# Altium PCB SWD_Cat_Programmer.PcbDoc
Units mm, origin at the board's own origin, x right, y up, seen from the top; angles counter-clockwise.
Board outline 40.55 x 20.09 mm, 2 copper layers (F.Cu, B.Cu); 28 components, 26 nets, 87 pads, 16 vias.
Unrouted connection lines stored in the file: 3.
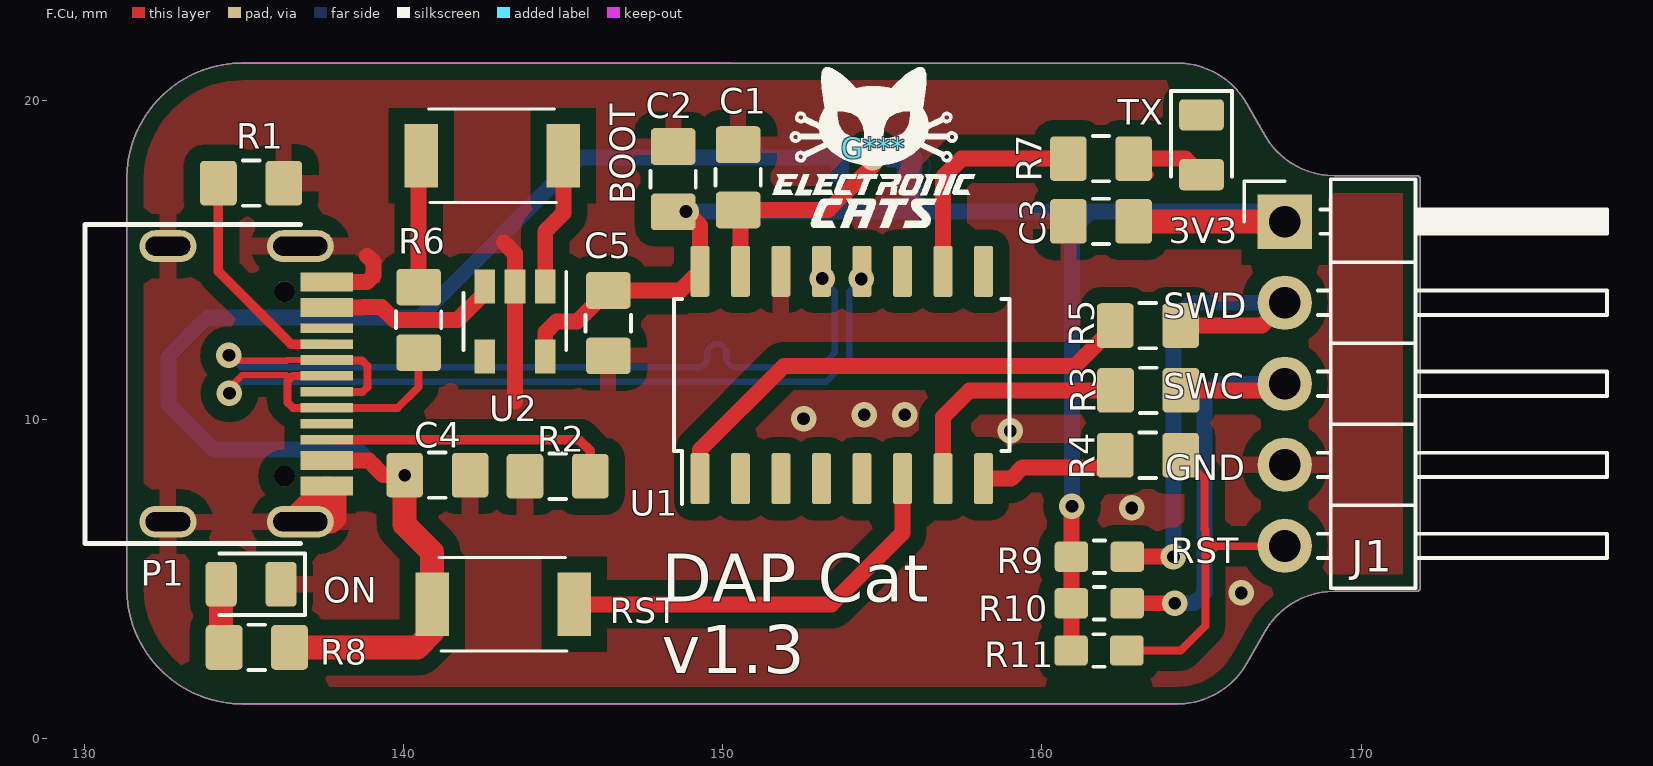
[diagram p0: F.Cu view]
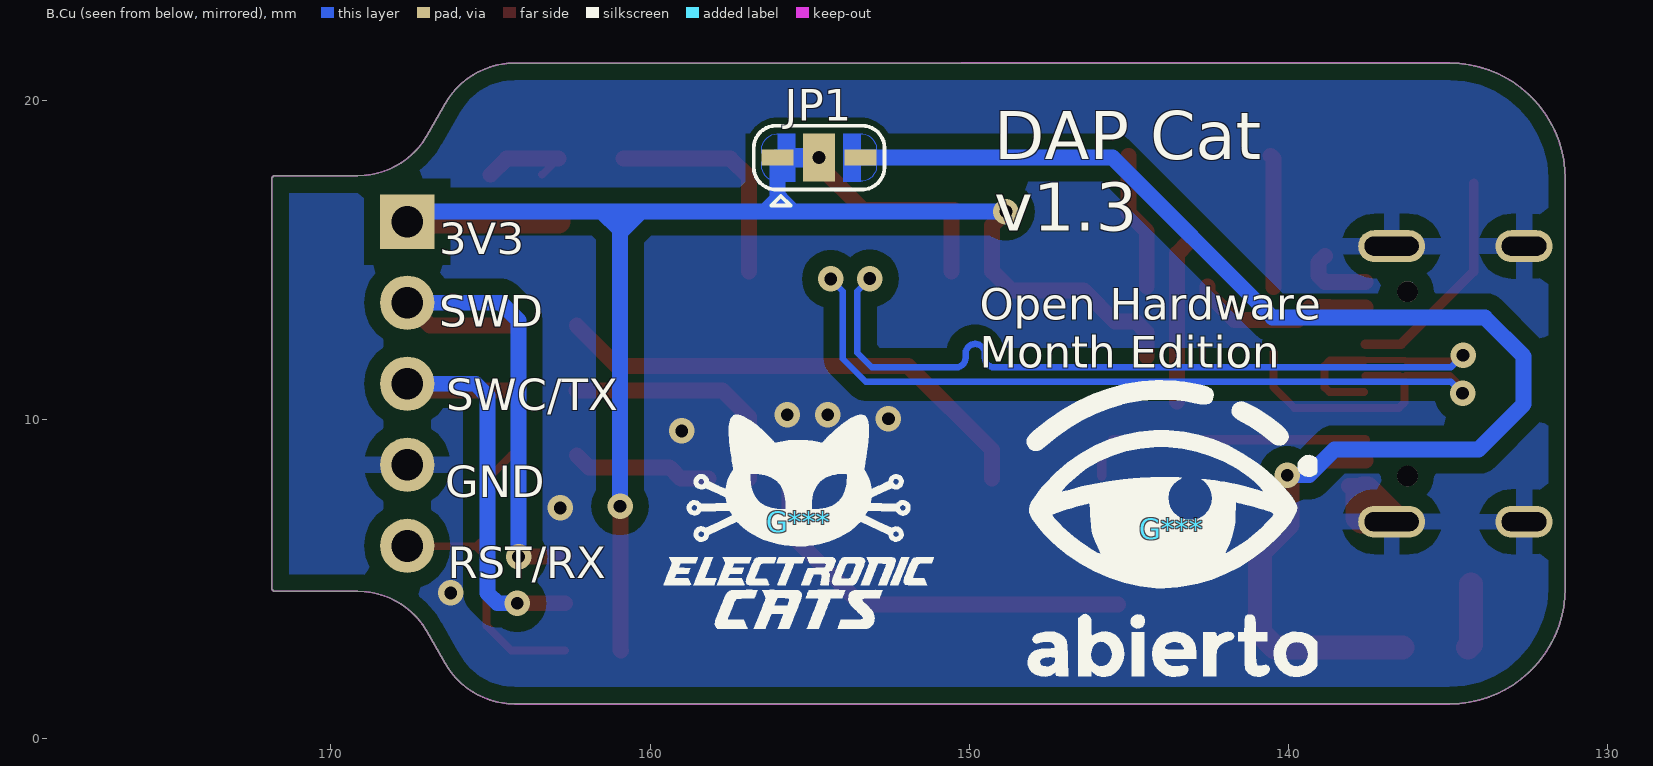
[diagram p1: B.Cu view, seen from below]

## Layer stack, top to bottom
F.Mask: solder mask 0.0102, Solder Resist, Dk 3.5
F.Cu: signal copper 0.0356
Dielectric 1: dielectric 0.32, FR-4, Dk 4.8
B.Cu: signal copper 0.0356
B.Mask: solder mask 0.0102, Solder Resist, Dk 3.5

## Board outline
150.236,21.184 136.235,21.184 134.94,21.184 ccw(c134.94,17.551) 131.308,17.551 131.308,4.725 ccw(c134.94,4.725) 134.94,1.093 136.235,1.092 150.236,1.093 164.236,1.093 ccw(c164.236,3.607) 166.421,2.362 166.98,3.353 cw(c169.164,2.109) 171.755,4.623 ccw(c171.755,4.724) 171.856,4.724 171.856,17.551 ccw(c171.755,17.551) 171.755,17.653 169.164,17.653 cw(c169.164,20.167) 166.98,18.923 166.421,19.914 ccw(c164.236,18.669) 150.236,21.184

## Design rules (kind name [scope] priority, off if disabled: settings)
Clearance "Clearence 0.508_Polygon" [InNamedPolygon('B.Cu-GND') OR InNamedPolygon('F.Cu-GND')] p1: gap=0.508 ignorepadtopadclearanceinfootprint=FALSE
Clearance "Clearence 0.2_NetClass" [InNetClass('Default')] p2: gap=0.2 ignorepadtopadclearanceinfootprint=FALSE
HoleSize "Hole Size (Default)" [All] p1: absolutevalues=TRUE maxlimit=10 minlimit=0.3 maxpercent=80.000 minpercent=20.000
MinimumSolderMaskSliver [All] p1: minsoldermaskwidth=0
PolygonConnect Polygon_F.Cu-GND_ConnectDirect [IsNamedPolygon('F.Cu-GND') vs IsVia] p1: connectstyle=Direct reliefconductorwidth=0.254 reliefentries=4 polygonreliefangle="90 Angle" airgapwidth=0.254
PolygonConnect Polygon_F.Cu-GND_ConnectRelief45 [IsNamedPolygon('F.Cu-GND') vs (IsThruPin or IsSMTPin) and (PadShape_AllLayers = 'Round')] p2: connectstyle=Relief reliefconductorwidth=0.508 reliefentries=4 polygonreliefangle="45 Angle" airgapwidth=0.508
PolygonConnect Polygon_F.Cu-GND_ConnectRelief90 [IsNamedPolygon('F.Cu-GND') vs (IsThruPin or IsSMTPin) and (PadShape_AllLayers <> 'Round')] p3: connectstyle=Relief reliefconductorwidth=0.508 reliefentries=4 polygonreliefangle="90 Angle" airgapwidth=0.508
PolygonConnect Polygon_B.Cu-GND_ConnectDirect [IsNamedPolygon('B.Cu-GND') vs IsVia] p4: connectstyle=Direct reliefconductorwidth=0.254 reliefentries=4 polygonreliefangle="90 Angle" airgapwidth=0.254
PolygonConnect Polygon_B.Cu-GND_ConnectRelief45 [IsNamedPolygon('B.Cu-GND') vs (IsThruPin or IsSMTPin) and (PadShape_AllLayers = 'Round')] p5: connectstyle=Relief reliefconductorwidth=0.508 reliefentries=4 polygonreliefangle="45 Angle" airgapwidth=0.508
PolygonConnect Polygon_B.Cu-GND_ConnectRelief90 [IsNamedPolygon('B.Cu-GND') vs (IsThruPin or IsSMTPin) and (PadShape_AllLayers <> 'Round')] p6: connectstyle=Relief reliefconductorwidth=0.508 reliefentries=4 polygonreliefangle="90 Angle" airgapwidth=0.508
RoutingVias [All] p1: holewidth=0.711 width=1.27 viastyle="Through Hole" minholewidth=0.711 minwidth=1.27 maxholewidth=0.711 maxwidth=1.27
SilkToSilkClearance [All] p1: silktosilkclearance=0
SilkToSolderMaskClearance [IsPad] p1: minsilkscreentomaskgap=0 clearancetoexposedcopper=TRUE
SolderMaskExpansion [All] p1: expansion=0.102 istentingtop=FALSE
Width [All] p1: maxlimit=10 minlimit=0.2 preferedwidth=0.25 minimp=50.000000 maximp=50.000000 favimp=50.000000
26 further rules are at their usual default settings.

## Classes and differential pairs
net class Default: +3V3 +5V D+ D- GND LED Net-(C1-Pad1) Net-(D1-Pad2) Net-(D2-Pad2) Net-(P1-PadA5) Net-(P1-PadB5) Net-(R3-Pad2) Net-(R4-Pad2) Net-(R5-Pad2) Net-(R6-Pad2) Net-(U1-Pad2) Net-(U1-Pad3) Net-(U1-Pad4) Net-(U1-Pad5) Net-(U1-Pad9) Net-(U1-Pad11) Net-(U2-Pad4) RESET RST SWCLK SWDIO

## Components (designator, comment, footprint, x,y, rotation, side; value= is the part's Value field where it differs from the comment)
BOOT "BOOT" TS1088R02026 142.773,18.278 r180 top
C1 "0.1uF" C_0805_2012Metric_Pad1.15x1.40mm_HandSolder 150.475,17.602 r90 top
C2 "0.1uF" C_0805_2012Metric_Pad1.15x1.40mm_HandSolder 148.438,17.543 r90 top
C3 "0.1uF" C_0805_2012Metric_Pad1.15x1.40mm_HandSolder 161.85,16.22 r180 top
C4 "1uF" C_0805_2012Metric_Pad1.15x1.40mm_HandSolder 141.049,8.265 r0 top
C5 "1uF" C_0805_2012Metric_Pad1.15x1.40mm_HandSolder 146.406,13.03 r270 top
G*** "LOGO" electronic_cats_logo_8x6 155.34,6.8 r0 bottom
G*** "LOGO" electronic_cats_logo_4x3 154.727,18.534 r0 top
G*** "LOGO" abierto 143.65,6.59 r0 bottom
J1 "DEBUG_OUTPUT" PinHeader_1x05_P2.54mm_Horizontal 167.61,16.21 r0 top
JP1 "Jumper" SolderJumper-3_P1.3mm_Bridged12_RoundedPad1.0x1.5mm 154.7,18.22 r0 bottom
ON "LED" LED_0805_2012Metric 135.209,4.846 r180 top
P1 "USB_C_Plug_USB2.0" C393939 136.754,11.125 r270 top
R1 "5.1K" R_0805_2012Metric_Pad1.15x1.40mm_HandSolder 135.209,17.42 r180 top
R2 "5.1K" R_0805_2012Metric_Pad1.15x1.40mm_HandSolder 144.818,8.232 r0 top
R3 "150" R_0805_2012Metric_Pad1.15x1.40mm_HandSolder 163.331,10.922 r180 top
R4 "150" R_0805_2012Metric_Pad1.15x1.40mm_HandSolder 163.322,8.89 r180 top
R5 "150" R_0805_2012Metric_Pad1.15x1.40mm_HandSolder 163.322,12.954 r180 top
R6 "20K" R_0805_2012Metric_Pad1.15x1.40mm_HandSolder 140.462,13.132 r90 top
R7 "1K" R_0805_2012Metric_Pad1.15x1.40mm_HandSolder 161.85,18.186 r180 top
R8 "1K" R_0805_2012Metric_Pad1.15x1.40mm_HandSolder 135.387,2.865 r0 top
R9 "70" R_0603_1608Metric_Pad1.05x0.95mm_HandSolder 161.8,5.71 r180 top
R10 "70" R_0603_1608Metric_Pad1.05x0.95mm_HandSolder 161.795,4.25 r180 top
R11 "70" R_0603_1608Metric_Pad1.05x0.95mm_HandSolder 161.785,2.77 r180 top
RST "RST" TS1088R02026 143.109,4.216 r0 top
TX "LED" LED_0805_2012Metric 165,18.62 r270 top
U1 "CH552G" SOP-16_4.55x10.3mm_P1.27mm 153.721,11.405 r90 top
U2 "AP2112K-3.3" SOT-23-5 143.48,13.08 r270 top

## Footprints (in the part's own frame and the unit in brackets; to place one, negate y for a bottom-side part, rotate by r counter-clockwise, add the part's x,y. Pads: shape width x height; smd on the part's side, far side on the other; paste and mask are expansions set on the pad)
abierto [mm]
  silkscreen extent -4.57,-4.65 4.55,4.65
C393939 [mm]
  rect 0.6x1.65 smd mask+0.05: A1(-3.2,0.825) A1(3.2,0.825) A4(-2.4,0.825) A4(2.4,0.825)
  rect 0.3x1.65 smd mask+0.05: A5(-1.25,0.825) A6(-0.25,0.825) A6(0.75,0.825) A7(-0.75,0.825) A7(0.25,0.825) A8(-1.75,0.825) B5(1.75,0.825) B8(1.25,0.825)
  rrect100% 1x2.1 hole 1.7 slot 0.6 at 0 deg paste-2.1 mask+0.05: S1(-4.32,0) S1(4.32,0)
  rrect100% 1x1.8 hole 1.4 slot 0.6 at 0 deg paste-1.8 mask+0.05: S1(-4.32,-4.15) S1(4.32,-4.15)
  round 0.65 hole 0.65 paste-0.65 mask+0.05: Un1(2.89,-0.5) Un2(-2.89,-0.5)
  silkscreen extent -5,-6.75 5,0
C_0805_2012Metric_Pad1.15x1.40mm_HandSolder [mm]
  rrect22% 1.15x1.4 smd mask+0.05: 1(-1.025,0) 2(1.025,0)
  silkscreen extent -0.26,-0.71 0.26,0.71
electronic_cats_logo_4x3 [mm]
  silkscreen extent -3.17,-2.51 3.17,2.51
electronic_cats_logo_8x6 [mm]
  silkscreen extent -4.23,-3.35 4.23,3.35
LED_0805_2012Metric [mm]
  rrect25% 0.975x1.4 smd mask+0.05: 1(-0.937,0) 2(0.937,0)
  silkscreen extent -1.69,-0.96 1,0.96
PinHeader_1x05_P2.54mm_Horizontal [mm]
  rect 1.7x1.7 hole 1 paste-1.7 mask+0.05: 1(0,0)
  rrect100% 1.7x1.7 hole 1 paste-1.7 mask+0.05: 2(0,-2.54) 3(0,-5.08) 4(0,-7.62) 5(0,-10.16)
  silkscreen extent -1.27,-11.49 10.1,1.33
R_0603_1608Metric_Pad1.05x0.95mm_HandSolder [mm]
  rrect25% 1.05x0.95 smd mask+0.05: 1(-0.875,0) 2(0.875,0)
  silkscreen extent -0.17,-0.51 0.17,0.51
R_0805_2012Metric_Pad1.15x1.40mm_HandSolder [mm]
  rrect22% 1.15x1.4 smd mask+0.05: 1(-1.025,0) 2(1.025,0)
  silkscreen extent -0.26,-0.71 0.26,0.71
SolderJumper-3_P1.3mm_Bridged12_RoundedPad1.0x1.5mm [mm]
  rect 1x0.5 smd paste-1 mask+0.05: 1(1.3,0) 3(-1.3,0)
  rect 1x1.5 smd paste-1.5 mask+0.05: 2(0,0)
  F.Cu circle w0: c-1.3,-0.25 r0.5
  F.Cu circle w0: c-1.3,0.25 r0.5
  F.Cu circle w0: c1.3,-0.25 r0.5
  F.Cu circle w0: c1.3,0.25 r0.5
  F.Cu region: -1.3,-0.75 -0.75,-0.75 -0.75,0.75 -1.3,0.75
  F.Cu region: 0.75,-0.75 1.3,-0.75 1.3,0.75 0.75,0.75
  F.Cu region: 0.4,-0.3 0.9,-0.3 0.9,0.3 0.4,0.3
  silkscreen extent -2.05,-1 2.05,1.5
SOP-16_4.55x10.3mm_P1.27mm [mm]
  rrect25% 1.6x0.6 smd mask+0.05: 1(-3.25,4.445) 2(-3.25,3.175) 3(-3.25,1.905) 4(-3.25,0.635) 5(-3.25,-0.635) 6(-3.25,-1.905) 7(-3.25,-3.175) 8(-3.25,-4.445) 9(3.25,-4.445) 10(3.25,-3.175) 11(3.25,-1.905) 12(3.25,-0.635) 13(3.25,0.635) 14(3.25,1.905) 15(3.25,3.175) 16(3.25,4.445)
  silkscreen extent -4.05,-5.26 2.38,5.26
SOT-23-5 [mm]
  rect 1.06x0.65 smd mask+0.05: 1(-1.1,0.95) 2(-1.1,0) 3(-1.1,-0.95) 4(1.1,-0.95) 5(1.1,0.95)
  silkscreen extent -1.55,-1.61 0.9,1.61
TS1088R02026 [mm]
  rect 1.05x2 smd mask+0.05: 1(-2.225,0) 2(2.225,0)
  silkscreen extent -2,-1.47 2,1.47

## Part data
BOOT RST: library part TS1088R02026, "TS-1088R-02026-1"
C1 C2 C3 C4 C5: library part C_0805_2012Metric_Pad1.15x1.40mm_HandSolder, "Capacitor SMD 0805 (2012 Metric), square (rectangular) end terminal, IPC_7351 nominal with elongated pad for handsoldering. (Body size source: https://docs.google.com/spreadsheets/d/1BsfQQcO9C6DZCsRaXUlFlo91Tg2WpOkGARC1WS5S8t0/edit?usp=sharing), generated with kicad-footprint-generator"
G***: library part electronic_cats_logo_8x6
G***: library part electronic_cats_logo_4x3
G***: library part abierto
J1: library part PinHeader_1x05_P2.54mm_Horizontal, "Through hole angled pin header, 1x05, 2.54mm pitch, 6mm pin length, single row"
JP1: library part SolderJumper-3_P1.3mm_Bridged12_RoundedPad1.0x1.5mm, "SMD Solder 3-pad Jumper, 1x1.5mm rounded Pads, 0.3mm gap, pads 1-2 bridged with 1 copper strip"
ON TX: library part LED_0805_2012Metric, "LED SMD 0805 (2012 Metric), square (rectangular) end terminal, IPC_7351 nominal, (Body size source: https://docs.google.com/spreadsheets/d/1BsfQQcO9C6DZCsRaXUlFlo91Tg2WpOkGARC1WS5S8t0/edit?usp=sharing), generated with kicad-footprint-generator"
P1: library part C393939
R1 R2 R3 R4 R5 R6 R7 R8: library part R_0805_2012Metric_Pad1.15x1.40mm_HandSolder, "Resistor SMD 0805 (2012 Metric), square (rectangular) end terminal, IPC_7351 nominal with elongated pad for handsoldering. (Body size source: https://docs.google.com/spreadsheets/d/1BsfQQcO9C6DZCsRaXUlFlo91Tg2WpOkGARC1WS5S8t0/edit?usp=sharing), generated with kicad-footprint-generator"
R9 R10 R11: library part R_0603_1608Metric_Pad1.05x0.95mm_HandSolder, "Resistor SMD 0603 (1608 Metric), square (rectangular) end terminal, IPC_7351 nominal with elongated pad for handsoldering. (Body size source: http://www.tortai-tech.com/upload/download/2011102023233369053.pdf), generated with kicad-footprint-generator"
U1: library part SOP-16_4.55x10.3mm_P1.27mm, "SOP, 16 Pin (https://toshiba.semicon-storage.com/info/docget.jsp?did=12855&prodName=TLP290-4), generated with kicad-footprint-generator ipc_gullwing_generator.py"
U2: library part SOT-23-5, "5-pin SOT23 package"

## Via types
v1: diameter 0.8, hole 0.4, F.Cu to B.Cu, tented both sides, 16 vias

## Nets (pads, with @x,y where several pads share a name; then routed paths per layer and width w, separated by ;. In a path a pad name is that pad's centre, name@x,y a point inside that pad or via, vN(x,y) a via of type N, cw(c..) or ccw(c..) an arc to the next point about the centre after c; other vN are vias at no path point)
+3V3: C2.1 C3.1 C5.1 J1.1 JP1.1 R9.2 R10.2 R11.2 U1.16 U2.5 | length 53.1
  F.Cu w0.5: U2.5 144.43,12.731 144.78,13.081 145.431,13.081 C5.1 ; C5.1@146.381,14.031 C5.1 ; v1(148.844,16.526) 149.276,16.095 U1.16 148.676,14.055 146.425,14.055 C5.1 ; R11.2 160.92,2.78 R10.2 160.92,5.705 R9.2 160.925,7.275 v1(160.94,7.29)
  F.Cu w0.75: C3.1 J1.1@167.6,16.22 ; 164.61,16.22 J1.1@167.6,16.22 ; J1.1 J1.1@167.6,16.22
  B.Cu w0.5: v1(148.844,16.526) 155.506,16.526 ; JP1.1 156,16.933 ; v1(160.94,7.29) 160.94,15.94 ; J1.1 167.294,16.526 162.706,16.526 161.506,16.526 ; 155.506,16.526 156.406,16.526 ; 155.506,16.526 155.913,16.933 156,16.933 ; 156,16.933 156.406,16.526 ; 156.406,16.526 160.106,16.526 160.28,16.53 ; 160.28,16.53 160.87,15.94 160.94,15.94 ; 160.28,16.53 160.694,16.526 160.99,16.53 ; 160.94,15.94 160.94,15.96 161.506,16.526 ; 160.94,15.94 160.94,16.48 160.99,16.53 ; 160.99,16.53 161.506,16.526
+5V: BOOT.1 C4.1 JP1.3 P1.A4 R8.2 RST.1 U2.1 U2.3 | length 56.4
  F.Cu w0.5: P1.A4@137.579,13.525 138.714,13.525 138.722,13.533 139.299,13.533 139.7,13.132 141.384,13.132 141.687,13.132 142.53,13.975 U2.3 ; P1.A4@138.155,8.775 138.105,8.725 137.579,8.725 138.904,8.725 139.09,8.538 139.09,8.524 139.349,8.265 v1(140.024,8.265) ; U2.1 144.43,15.906 144.998,16.474 BOOT.1
  F.Cu w0.75: R8.2 140.416,2.865 140.884,3.333 RST.1 140.884,5.862 140.024,6.722 v1(140.024,8.265)
  B.Cu w0.5: v1(140.024,8.265) 139.349,8.265 138.546,9.068 134.036,9.068 132.613,10.49 132.613,11.989 133.833,13.208 140.488,13.208 145.5,18.22 145.7,18.22 JP1.3
D+: P1.A6 R6.1 U1.12 | length 33.8
  F.Cu w0.2: v1(134.531,10.833) 134.531,11.006 134.925,11.4 136.316,11.4 136.341,11.375 P1.A6@137.579,11.375 ; v1@134.549,10.734 v1@134.783,10.968 ; U1.12@154.335,14.634 U1.12
  F.Cu w0.25: P1.A6@137.579,11.375 136.504,11.375 136.348,11.22 136.348,10.968 136.348,10.545 136.519,10.375 137.579,10.375 139.806,10.375 140.462,11.031 R6.1
  B.Cu w0.2: v1(134.531,10.833) 134.893,11.195 153.237,11.195 153.953,11.911 153.953,14.032 v1(154.335,14.414)
D-: P1.A7 U1.13 | length 29.4
  F.Cu w0.2: v1@134.503,11.989 v1@134.617,11.875 ; v1(134.513,12.024) 134.687,11.85 136.316,11.85 136.341,11.875 P1.A7@137.579,11.875 ; U1.13 U1.13@153.126,14.614
  F.Cu w0.25: P1.A7@137.621,10.865 138.696,10.865 138.852,11.02 138.852,11.695 138.681,11.865 P1.A7@137.621,11.865
  B.Cu w0.2: v1(134.513,12.024) 134.893,11.645 149.207,11.645 149.274,11.652 149.337,11.675 149.394,11.71 149.442,11.758 149.477,11.815 149.5,11.878 149.507,11.945 149.507,12.079 149.515,12.146 149.537,12.209 149.573,12.266 149.62,12.313 149.677,12.349 149.74,12.371 149.807,12.379 149.874,12.371 149.937,12.349 149.994,12.313 150.042,12.266 150.077,12.209 150.1,12.146 150.107,12.079 150.107,11.945 150.115,11.878 150.137,11.815 150.173,11.758 150.22,11.71 150.277,11.675 150.34,11.652 150.407,11.645 153.051,11.645 153.503,12.098 153.503,14.032 v1(153.109,14.427)
GND: C1.2 C2.2 C3.2 C4.2 C5.2 J1.4 ON.1 P1.A1 P1.S1 R1.1 R2.1 TX.1 U1.14 U2.2 | length 11.5
  F.Cu w0.5: P1.A1@137.579,7.925 P1.A1@138.095,7.925 ; P1.A1@137.579,14.325 138.849,14.325 139.05,14.526 139.05,14.935 138.849,15.136 ; 143.129,15.561 143.48,15.21 U2.2 143.48,10.571
  F.Cu w0.75: P1.S1@136.754,6.805 136.754,7.1 137.504,7.85 137.654,7.85 137.82,7.683 137.82,6.921 137.704,6.805 P1.S1@136.754,6.805
  other v1: 166.243,4.572 162.814,7.239 159.004,9.652 152.527,10.033 154.432,10.16 155.702,10.16
LED: R7.2 U1.10 | length 7.1
  F.Cu w0.5: U1.10 156.896,17.602 157.48,18.186 R7.2
Net-(C1-Pad1): C1.1 JP1.2 U1.15 | length 7
  F.Cu w0.5: C1.1 153.307,16.577 154.7,17.97 v1(154.7,18.22) ; U1.15 150.546,16.399 150.576,16.429 C1.1@150.724,16.577
Net-(D1-Pad2): R7.1 TX.2 | length 3
  F.Cu w0.25: R7.1 R7.1@163.379,17.682
  F.Cu w0.5: R7.1 164.496,18.186 TX.2
Net-(D2-Pad2): ON.2 R8.1 | length 2.1
  F.Cu w0.25: ON.2 ON.2@134.362,4.756
  F.Cu w0.75: ON.2 134.272,2.955 R8.1
Net-(P1-PadA5): P1.A5 R1.2 | length 7.1
  F.Cu w0.3: R1.2 134.184,16.62 134.184,14.645 136.454,12.375 P1.A5
Net-(P1-PadB5): P1.B5 R2.2 | length 9.2
  F.Cu w0.3: P1.B5 145.491,9.375 145.843,9.023 R2.2
Net-(R3-Pad2): R3.2 U1.7 | length 7.7
  F.Cu w0.5: U1.7 156.896,10.084 157.734,10.922 R3.2
Net-(R4-Pad2): R4.2 U1.8 | length 4.4
  F.Cu w0.5: U1.8 159.031,8.155 159.385,8.509 161.916,8.509 R4.2
Net-(R5-Pad2): R5.2 U1.1 | length 15.5
  F.Cu w0.5: U1.1 149.276,9.055 151.905,11.684 161.027,11.684 R5.2
Net-(R6-Pad2): BOOT.2 R6.2 | length 4.2
  F.Cu w0.5: R6.2 140.462,18.191 BOOT.2
Net-(U1-Pad2): U1.2
Net-(U1-Pad3): U1.3
Net-(U1-Pad4): U1.4
Net-(U1-Pad5): U1.5
Net-(U1-Pad9): U1.9
Net-(U1-Pad11): U1.11
Net-(U2-Pad4): U2.4
RESET: J1.5 R4.1 R11.1 | length 12.2
  F.Cu w0.25: R11.1 164.35,2.77 165.12,3.54 165.12,5.59 ; R4.1 165.1,8.137 165.1,6.58 165.12,6.56 ; J1.5 165.44,6.03 ; 165.12,5.59 165.12,6.18 ; 165.12,5.59 165.12,5.71 165.44,6.03 ; 165.12,6.18 165.12,6.56 ; 165.12,6.18 165.25,6.05 165.44,6.03 ; 165.12,6.56 165.12,6.35 165.44,6.03
RST: RST.2 U1.6 | length 13.7
  F.Cu w0.5: RST.2 153.396,4.216 155.626,6.446 U1.6 U1.6@155.626,7.355
SWCLK: J1.3 R3.1 R10.1 | length 14.8
  F.Cu w0.5: R10.1 v1(164.16,4.25) ; R3.1 167.402,10.922 J1.3
  B.Cu w0.5: v1(164.16,4.25) 164.778,4.25 165.1,4.572 165.1,10.76 165.47,11.13 J1.3
SWDIO: J1.2 R5.1 R9.1 | length 16.1
  F.Cu w0.5: R9.1 v1(164.12,5.71) ; R5.1 166.894,12.954 J1.2
  B.Cu w0.5: v1(164.12,5.71) 164.12,13.11 164.68,13.67 J1.2
pads on no net: P1.A8 P1.B8 P1.Un1 P1.Un2

## Polygon pours and split planes (outlines as drawn)
GND on B.Cu "B.Cu-GND" (solid, remove dead copper, pour order 0): 171.95,0.01 131.09,0.01 131.09,21.72 171.95,21.72
GND on F.Cu "F.Cu-GND" (solid, remove dead copper, pour order 1): 171.97,21.69 171.96,0 131.14,0.02 131.09,21.72

## Keep-outs
Edge.Cuts:
  lines w0.05: 131.308,4.725 ccw(c134.94,4.725) 134.94,1.093 ; 131.308,4.725 ccw(c134.94,4.725) 134.94,1.093 ; 131.308,4.725 131.308,17.551 ; 131.308,4.725 131.308,17.551 ; 131.308,17.551 cw(c134.94,17.551) 134.94,21.184 ; 131.308,17.551 cw(c134.94,17.551) 134.94,21.184 ; 134.94,1.093 136.235,1.092 ; 134.94,1.093 136.235,1.092 ; 134.94,21.184 136.235,21.184 ; 134.94,21.184 136.235,21.184 ; 136.235,1.092 150.236,1.093 ; 136.235,1.092 150.236,1.093 ; 136.235,21.184 150.236,21.184 ; 136.235,21.184 150.236,21.184 ; 150.236,1.093 164.236,1.093 ; 150.236,1.093 164.236,1.093 ; 150.236,21.184 164.236,21.183 ; 150.236,21.184 164.236,21.183 ; 164.236,1.093 ccw(c164.236,3.607) 166.421,2.362 ; 164.236,1.093 ccw(c164.236,3.607) 166.421,2.362 ; 164.236,21.183 cw(c164.236,18.669) 166.421,19.914 ; 164.236,21.183 cw(c164.236,18.669) 166.421,19.914 ; 166.421,2.362 166.98,3.353 ; 166.421,2.362 166.98,3.353 ; 166.421,19.914 166.98,18.923 ; 166.421,19.914 166.98,18.923 ; 166.98,3.353 cw(c169.164,2.109) 169.164,4.623 ; 166.98,3.353 cw(c169.164,2.109) 169.164,4.623 ; 166.98,3.353 166.98,3.353 ; 166.98,3.353 166.98,3.353 ; 166.98,18.922 ccw(c169.164,20.167) 169.164,17.653 ; 166.98,18.922 ccw(c169.164,20.167) 169.164,17.653 ; 166.98,18.922 166.98,18.923 ; 166.98,18.922 166.98,18.923 ; 169.164,4.623 171.755,4.623 ; 169.164,4.623 171.755,4.623 ; 169.164,17.653 171.755,17.653 ; 169.164,17.653 171.755,17.653 ; 171.755,4.623 ccw(c171.755,4.724) 171.856,4.724 ; 171.755,4.623 ccw(c171.755,4.724) 171.856,4.724 ; 171.755,17.653 cw(c171.755,17.551) 171.856,17.551 ; 171.755,17.653 cw(c171.755,17.551) 171.856,17.551 ; 171.856,4.724 171.856,17.551 ; 171.856,4.724 171.856,17.551

## Silkscreen, mask and mechanical layers (free items; w line width, h text height)
F.SilkS:
  text "3V3" at 163.971,15.54 h0.8
  text "SWD" at 163.796,13.18 h0.8
  text "SWC" at 163.797,10.66 h0.8
  text "GND" at 163.859,8.1 h0.8
  text "RST" at 164.031,5.5 h0.8
  text "DAP Cat / v1.3" at 148.079,2.05 h1.5
B.SilkS:
  text "DAP Cat / v1.3" at 149.211,15.92 h1.5
  text "3V3" at 166.614,15.19 h1
  text "SWD" at 166.614,12.92 h1
  text "Open Hardware / Month Edition" at 149.671,11.63 h1
  text "SWC/TX" at 166.391,10.299 h1
  text "GND" at 166.416,7.57 h1
  text "RST/RX" at 166.338,5.039 h1